# Altium PCB Ticket_Dispancer.PcbDoc (part 4 of 5)
Units mm, origin at the board's own origin, x right, y up, seen from the top; angles counter-clockwise.
Board outline 150.11 x 200.66 mm, 2 copper layers (Top Layer, Bottom Layer); 297 components, 258 nets, 997 pads, 217 vias.
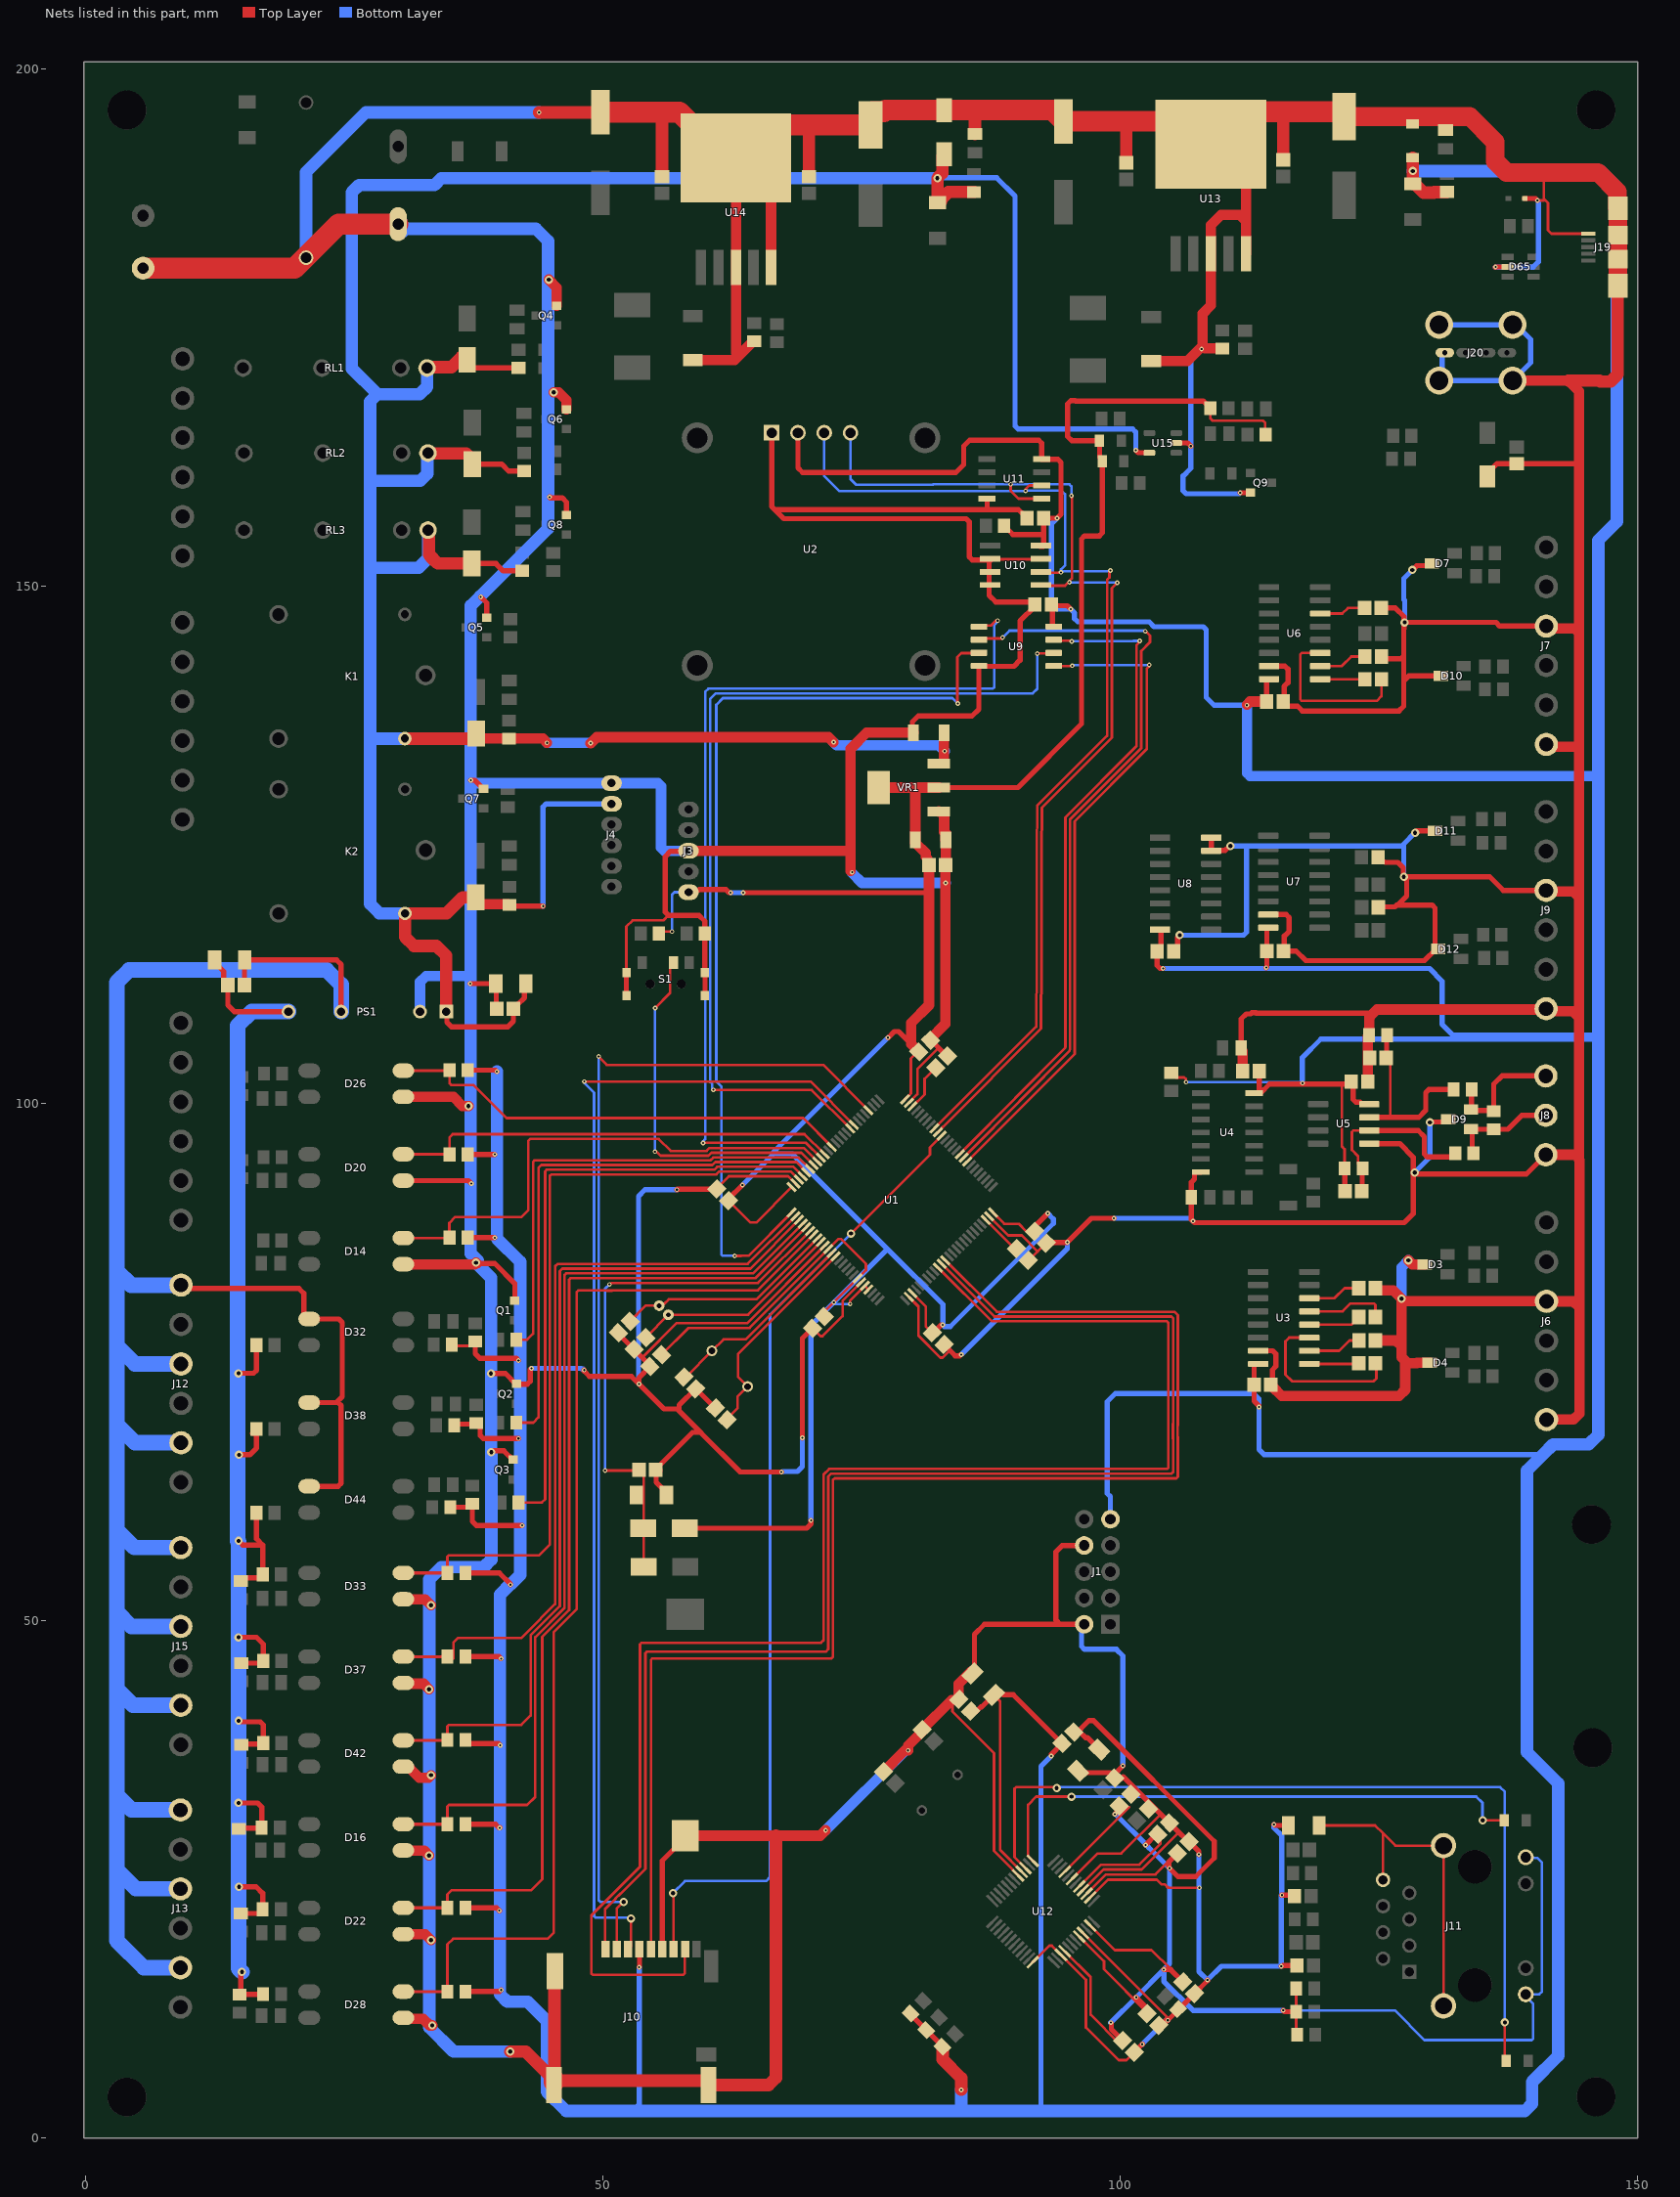
[diagram p2: the nets of this part, all layers, seen from the top]

## Via types
v1: diameter 0.45, hole 0.2, Top Layer to Bottom Layer, 169 vias
v2: diameter 0.8, hole 0.4, Top Layer to Bottom Layer, 48 vias

## Nets (pads, with @x,y where several pads share a name; then routed paths per layer and width w, separated by ;. In a path a pad name is that pad's centre, name@x,y a point inside that pad or via, vN(x,y) a via of type N, cw(c..) or ccw(c..) an arc to the next point about the centre after c; other vN are vias at no path point) (continued)
GND: (continued)
  Bottom Layer w1: PS1.2@32.336,108.87 32.336,111.724 32.922,112.31 37.24,112.31 ; 37.264,130.95 J4.6@50.85,130.95 55.337,130.95 55.63,130.657 55.63,124.72 55.94,124.41 J3.3@58.29,124.41 ; v1(71.539,29.741) 79.268,37.47 ; v1@74.09,122.273 75.053,121.31 v1(83.13,121.31) ; v2(127.18,81.13) 127.18,84.15 v2(127.86,84.83)
  Bottom Layer w1.2: C65.1@21.336,181.73 21.336,189.996 27.11,195.77 v1(43.84,195.77) ; RV1.1@30.401,184.525 43.538,184.525 44.71,183.353 44.71,155.57 38.15,149.01 37.24,148.1 v1(37.24,131.224) 37.24,130.974 37.24,112.31 37.24,85.502 v2@37.946,84.796 ; v2(37.75,84.6) 39.2,83.15 v2(39.2,73.9) v2@39.2,66.32 ; v2(39.23,66.29) 39.23,55.903 38.507,55.18 34.402,55.18 33.23,54.008 33.23,10.7 35.57,8.36 v2(41.06,8.36)
  Bottom Layer w2: RV1.1@30.226,184.972 30.226,184.7 RV1.1@30.401,184.525
IO0: U1.58 U9.5 | length 64.6
  Top Layer w0.254: U1.58@85.226,94.39 95.61,104.774 95.61,127.27 102.57,134.23 102.57,142.007 102.805,142.242 v1(102.805,142.39) ; U9.5@93.545,142.242 U9.5@93.574,142.271 95.338,142.271 v1(95.367,142.3)
  Bottom Layer w0.254: v1(95.367,142.3) 95.412,142.345 102.76,142.345 v1(102.805,142.39)
IO1: U1.59 U9.2 | length 75
  Top Layer w0.254: U1.59@84.872,94.744 85.19,95.091 85.376,95.276 95.121,105.087 95.151,105.233 95.151,105.236 95.156,105.241 95.156,127.458 102.024,134.326 102.024,143.722 102.88,144.578 102.88,145.204 102.458,145.626 v1(102.43,145.626) ; U9.2@86.335,144.782 86.478,144.926 88.536,144.926 v1(88.64,145.03)
  Bottom Layer w0.254: v1(88.64,145.03) 88.653,145.03 89.303,145.68 102.376,145.68 v1(102.43,145.626)
IO2: U1.1 U9.3 | length 92.5
  Top Layer w0.254: v1(62.75,85.27) 62.757,85.263 63.353,85.263 63.36,85.27 64.085,85.27 U1.1@68.255,89.441 ; v1(84.316,138.65) 84.26,138.706 84.26,143.13 84.642,143.512 U9.3@86.335,143.512
  Bottom Layer w0.254: v1(62.75,85.27) 61.611,85.27 61.462,85.419 61.462,101.633 60.969,102.126 60.969,138.528 61.611,139.17 83.796,139.17 v1(84.316,138.65)
IO3: U1.60 U9.7 | length 65.2
  Top Layer w0.254: U1.60@84.519,95.097 84.836,95.444 85.022,95.63 94.628,105.301 94.697,105.369 94.697,105.424 94.702,105.429 94.702,127.646 101.57,134.514 101.57,144.278 101.897,144.605 v1(101.897,144.7) ; U9.7@93.545,144.782 93.616,144.711 95.249,144.711 v1(95.32,144.64)
  Bottom Layer w0.254: v1(95.32,144.64) 95.35,144.67 101.27,144.67 101.3,144.7 v1(101.897,144.7)
IO_CLK: U1.84 U9.6 | length 89.7
  Top Layer w0.254: v1(60.681,101.31) 60.704,101.287 70.197,101.287 U1.84@73.912,97.572 ; v1(91.99,143.47) 92.011,143.491 93.524,143.491 U9.6@93.545,143.512
  Bottom Layer w0.254: v1(60.681,101.31) 60.577,101.414 60.577,101.877 60.37,102.083 60.37,139.083 60.911,139.624 91.544,139.624 91.99,140.07 v1(91.99,143.47)
IO_CS: U1.92 U9.1 | length 92.4
  Top Layer w0.254: v1(59.7,96.185) 69.643,96.185 U1.92@71.084,94.744 ; U9.1@86.335,146.052 86.498,146.215 86.516,146.198 87.55,146.198 88.012,146.66 v1(88.16,146.66)
  Bottom Layer w0.254: v1(59.7,96.185) 59.7,96.333 59.9,96.533 59.9,139.78 60.198,140.078 87.681,140.078 87.83,140.227 87.83,146.238 88.16,146.568 v1(88.16,146.66)
LINKLED: R34.1 U12.25 | length 53.9
  Top Layer w0.254: U12.25@91.549,26.8 91.096,27.253 91.096,32.219 91.878,33 v2(95.3,33) ; v2(135.04,30.71) 137.12,30.71 R34.1@137.126,30.716
  Bottom Layer w0.254: v2(95.3,33) 134.41,33 135,32.41 135,30.75 v2(135.04,30.71)
M_SCL: U1.67 U2.3 U10.6 U11.6 | length 105.6
  Top Layer w0.254: U1.67@82.044,97.572 91.883,107.411 91.943,113.859 91.943,124.679 91.978,128.362 91.978,128.364 91.978,128.774 98.734,135.53 98.734,150.602 98.956,150.824 98.956,151.406 v1(99.06,151.51) ; v1(90.85,159.184) 90.888,159.222 90.888,159.388 91.219,159.719 U11.6@92.422,159.719 ; U10.6@92.344,151.22 92.414,151.29 94.25,151.29 v1(94.284,151.324)
  Bottom Layer w0.254: U2.3@71.4,164.82 71.4,160.63 72.846,159.184 v1(90.85,159.184) ; v1@90.85,159.22 94.32,159.22 94.67,158.87 94.67,151.993 94.284,151.607 v1(94.284,151.324) 94.376,151.416 98.966,151.416 v1(99.06,151.51)
M_SDA: U1.66 U2.4 U10.5 U11.5 | length 107.3
  Top Layer w0.254: U1.66@82.397,97.219 82.715,97.566 82.901,97.751 92.335,107.222 92.397,113.858 92.397,124.492 92.432,128.173 92.432,128.176 92.432,128.586 99.188,135.342 99.188,149.788 v1(99.72,150.32) ; v1(89.42,159.836) 89.42,159.21 90.181,158.449 U11.5@92.422,158.449 ; U10.5@92.254,150.04 94.678,150.04 94.998,150.36 v1(95.1,150.36) 95.1,150.508 95.33,150.738 95.33,158.561 95.328,158.564 95.328,158.702 v1(95.29,158.74)
  Bottom Layer w0.254: U2.4@73.94,164.82 73.94,160.34 74.49,159.79 81.905,159.79 81.951,159.836 v1(89.42,159.836) ; v1@89.42,159.79 89.466,159.836 95.095,159.836 95.29,159.641 v1(95.29,158.74) ; v1(95.1,150.36) 95.12,150.34 99.7,150.34 v1(99.72,150.32)
MVCC: C7.2 C8.2 C9.2 C10.2 C11.2 C12.2 C71.2 C72.2 D1.1 J3.1 R1.1 R99.2 R100.2 R101.2 R107.2 U1.11 U1.19 U1.21 U1.22 U1.28 U1.50 U1.75 U1.100 VR1.2 VR1.4 | length 307.5
  Top Layer w0.254: R1.1@55.425,116.43 55.605,116.61 v1(56.7,116.61) ; C7.2@55.696,75.696 58.3,78.3 64.186,78.3 U1.11@71.791,85.905 71.805,85.905 72.8,86.9 73.01,86.9 75.42,84.49 75.42,83.877 U1.19@74.619,83.077 71.5,79.957 C9.2@71.5,79.22 ; C12.2@62.16,90.6 64.27,88.49 64.83,88.49 U1.100@68.255,91.915 ; v1(73.9,80.61) 73.9,80.943 U1.21@75.326,82.37 U1.22@75.68,82.016 ; U1.75@79.215,100.401 79.78,100.965 79.78,104.353 C11.2@80.458,105.031 ; U1.28@79.923,81.662 81.204,80.381 81.204,78.456 C8.2@81.84,77.82 ; U1.50@87.701,89.441 88.784,88.357 90.193,88.357 90.944,87.606 91.683,87.606 C10.2@91.719,87.641 ; R107.2@108.72,166.812 108.72,166.18 108.92,165.98 113.78,165.98 114.01,165.75 114.01,164.785 R99.2@114.052,164.742
  Top Layer w0.5: D1.1@57.91,58.945 69.705,58.945 70.12,59.36 v1(70.12,59.69) ; J3.1@58.29,120.41 58.481,120.601 59.275,120.601 59.333,120.659 61.901,120.659 62.19,120.37 v1(62.356,120.37) ; C12.2@62.16,90.6 62.16,90.77 v1(63.5,92.11) ; v1(63.568,120.37) 81.18,120.37 81.524,120.714 ; v1(77.56,106.35) 77.59,106.35 78.177,106.937 78.591,106.937 79.791,105.738 ; C71.2@80.203,125.186 C71.2@80.203,125.461 ; C8.2@81.84,77.82 81.936,77.82 82.706,78.59 v1(82.85,78.59) ; VR1.2@82.468,130.525 90.105,130.525 96.271,136.691 96.271,154.548 96.564,154.841 97.98,154.841 98.273,155.134 98.273,158.653 98.264,158.662 R101.2@98.264,162.052 98.264,162.202 98.01,162.456 R100.2@98.01,164.056 95.324,164.056 94.91,164.47 94.91,167.59 95.243,167.923 95.657,167.923 95.7,167.88 108.02,167.88 108.295,167.605 108.395,167.605 108.72,167.28 R107.2@108.72,167.18 ; C10.2@91.719,87.641 91.719,88.089 v1(93,89.37) ; R99.2@114.052,164.742 R99.2@114.06,164.75
  Top Layer w1: VR1.4@76.668,130.525 80.45,130.525 ; C71.2@80.203,125.186 80.228,125.161 81.2,124.189 81.2,123.818 81.374,123.644 81.374,123.182 C72.2@81.524,123.032 81.524,120.714 81.524,109.494 79.791,107.761 79.791,105.738 C11.2@80.544,104.984 ; C71.2@80.203,125.461 80.203,130.278 80.45,130.525 ; VR1.2@82.468,130.525 80.45,130.525
  Bottom Layer w0.254: v1(56.7,116.61) 56.7,120.2 56.91,120.41 J3.1@58.29,120.41 ; v1(72.33,80.77) 72.33,80.759 72.479,80.61 v1(73.9,80.61)
  Bottom Layer w0.5: v1(62.356,120.37) v1(63.568,120.37) ; v1(63.5,92.11) 66.52,95.13 ; v1(70.12,59.69) 70.12,78.56 v1(72.33,80.77) 77.445,85.885 77.555,85.885 ; v1(77.56,106.35) 66.52,95.31 66.52,95.13 ; v1(93,89.37) 93.554,88.816 93.554,88.402 83.581,78.429 83.011,78.429 v1(82.85,78.59) 82.874,78.614 82.874,80.566 77.555,85.885 ; 66.52,95.13 68.31,95.13 77.555,85.885
NetC1_1: C1.1 U1.12 Y1.2 | length 19.3
  Top Layer w0.254: C1.1@57.839,73.561 58.021,73.561 Y1.2@60.545,76.085 61.659,77.2 63.793,77.2 U1.12@72.144,85.551
NetC2_1: C2.1 U1.13 Y1.1 | length 20.9
  Top Layer w0.254: C2.1@62.02,69.41 62.02,69.53 63.04,70.55 63.04,71.679 Y1.1@63.995,72.635 63.06,73.57 63.06,75.76 U1.13@72.498,85.198
NetC3_1: C3.1 U1.8 Y2.1 | length 21.4
  Top Layer w0.254: C3.1@52.636,78.95 54.14,80.455 Y2.1@55.456,80.455 55.606,80.604 55.922,80.604 56.391,81.073 64.838,81.073 U1.8@70.73,86.966
NetC4_1: C4.1 U1.9 Y2.2 | length 20.8
  Top Layer w0.254: C4.1@54.158,77.356 54.158,77.389 Y2.2@56.34,79.571 64.042,79.571 U1.9@71.084,86.612
NetC13_1: C13.1 U1.48 | length 4.1
  Top Layer w0.254: U1.48@86.994,88.733 89.771,85.956 C13.1@89.974,85.956
NetC14_1: C14.1 U1.73 | length 4.7
  Top Layer w0.254: U1.73@79.923,99.694 81.09,100.861 81.09,102.373 C14.1@82.178,103.461
NetC15_2: C15.2 C16.2 D1.2 D2.2 U1.6 | length 52.6
  Top Layer w0.254: v1(50.22,64.51) 53.43,64.51 C16.2@53.5,64.58 53.96,64.12 D2.2@53.96,55.189 ; v1(50.65,82.504) 50.703,82.504 50.849,82.65 65,82.65 U1.6@70.023,87.673
  Bottom Layer w0.254: v1(50.22,64.51) 50.216,64.514 50.216,82.07 v1(50.65,82.504)
NetC18_1: C18.1 U3.3 | length 16.4
  Top Layer w0.254: U3.3@118.28,77.359 116.329,77.359 115.97,77 115.97,73.79 116.62,73.14 124.49,73.14 124.76,73.41 124.76,74.782 C18.1@124.66,74.881
NetC18_2: C18.2 U3.1 | length 4.8
  Top Layer w0.254: U3.1@118.28,74.819 122.998,74.819 C18.2@123.06,74.881
NetC19_2: C19.2 U3.2 | length 5.2
  Top Layer w0.254: U3.2@118.28,76.089 121.171,76.089 122.167,77.086 C19.2@123.067,77.086
NetC20_2: C20.2 U3.6 | length 5.2
  Top Layer w0.254: U3.6@118.28,81.169 120.709,81.169 121.68,82.14 C20.2@123.06,82.14
NetC21_1: C21.1 U3.5 | length 7.9
  Top Layer w0.254: U3.5@118.28,79.899 121.489,79.899 122.249,80.66 124.511,80.66 124.66,80.511 C21.1@124.66,79.36
NetC21_2: C21.2 U3.4 | length 5.1
  Top Layer w0.254: U3.4@118.28,78.629 122.379,78.629 123.06,79.31 C21.2@123.06,79.36
NetC27_1: C27.1 U6.3 | length 16.1
  Top Layer w0.254: U6.3@119.335,143.535 117.544,143.535 117.395,143.386 117.395,139.054 117.544,138.905 124.785,138.905 125.243,139.363 C27.1@125.243,140.987
NetC27_2: C27.2 U6.1 | length 4.3
  Top Layer w0.254: U6.1@119.335,140.995 123.635,140.995 C27.2@123.643,140.987
NetC28_2: C28.2 U6.2 | length 4.7
  Top Layer w0.254: U6.2@119.335,142.265 121.405,142.265 122.331,143.191 C28.2@123.643,143.191
NetC29_2: C29.2 U6.6 | length 4.5
  Top Layer w0.254: U6.6@119.335,147.345 121.465,147.345 122,147.88 C29.2@123.63,147.88